# EAGLE board Dual_H-Bridge_Block-GiantPanel-v10 (EAGLE 6.6.0), part 1 of 13
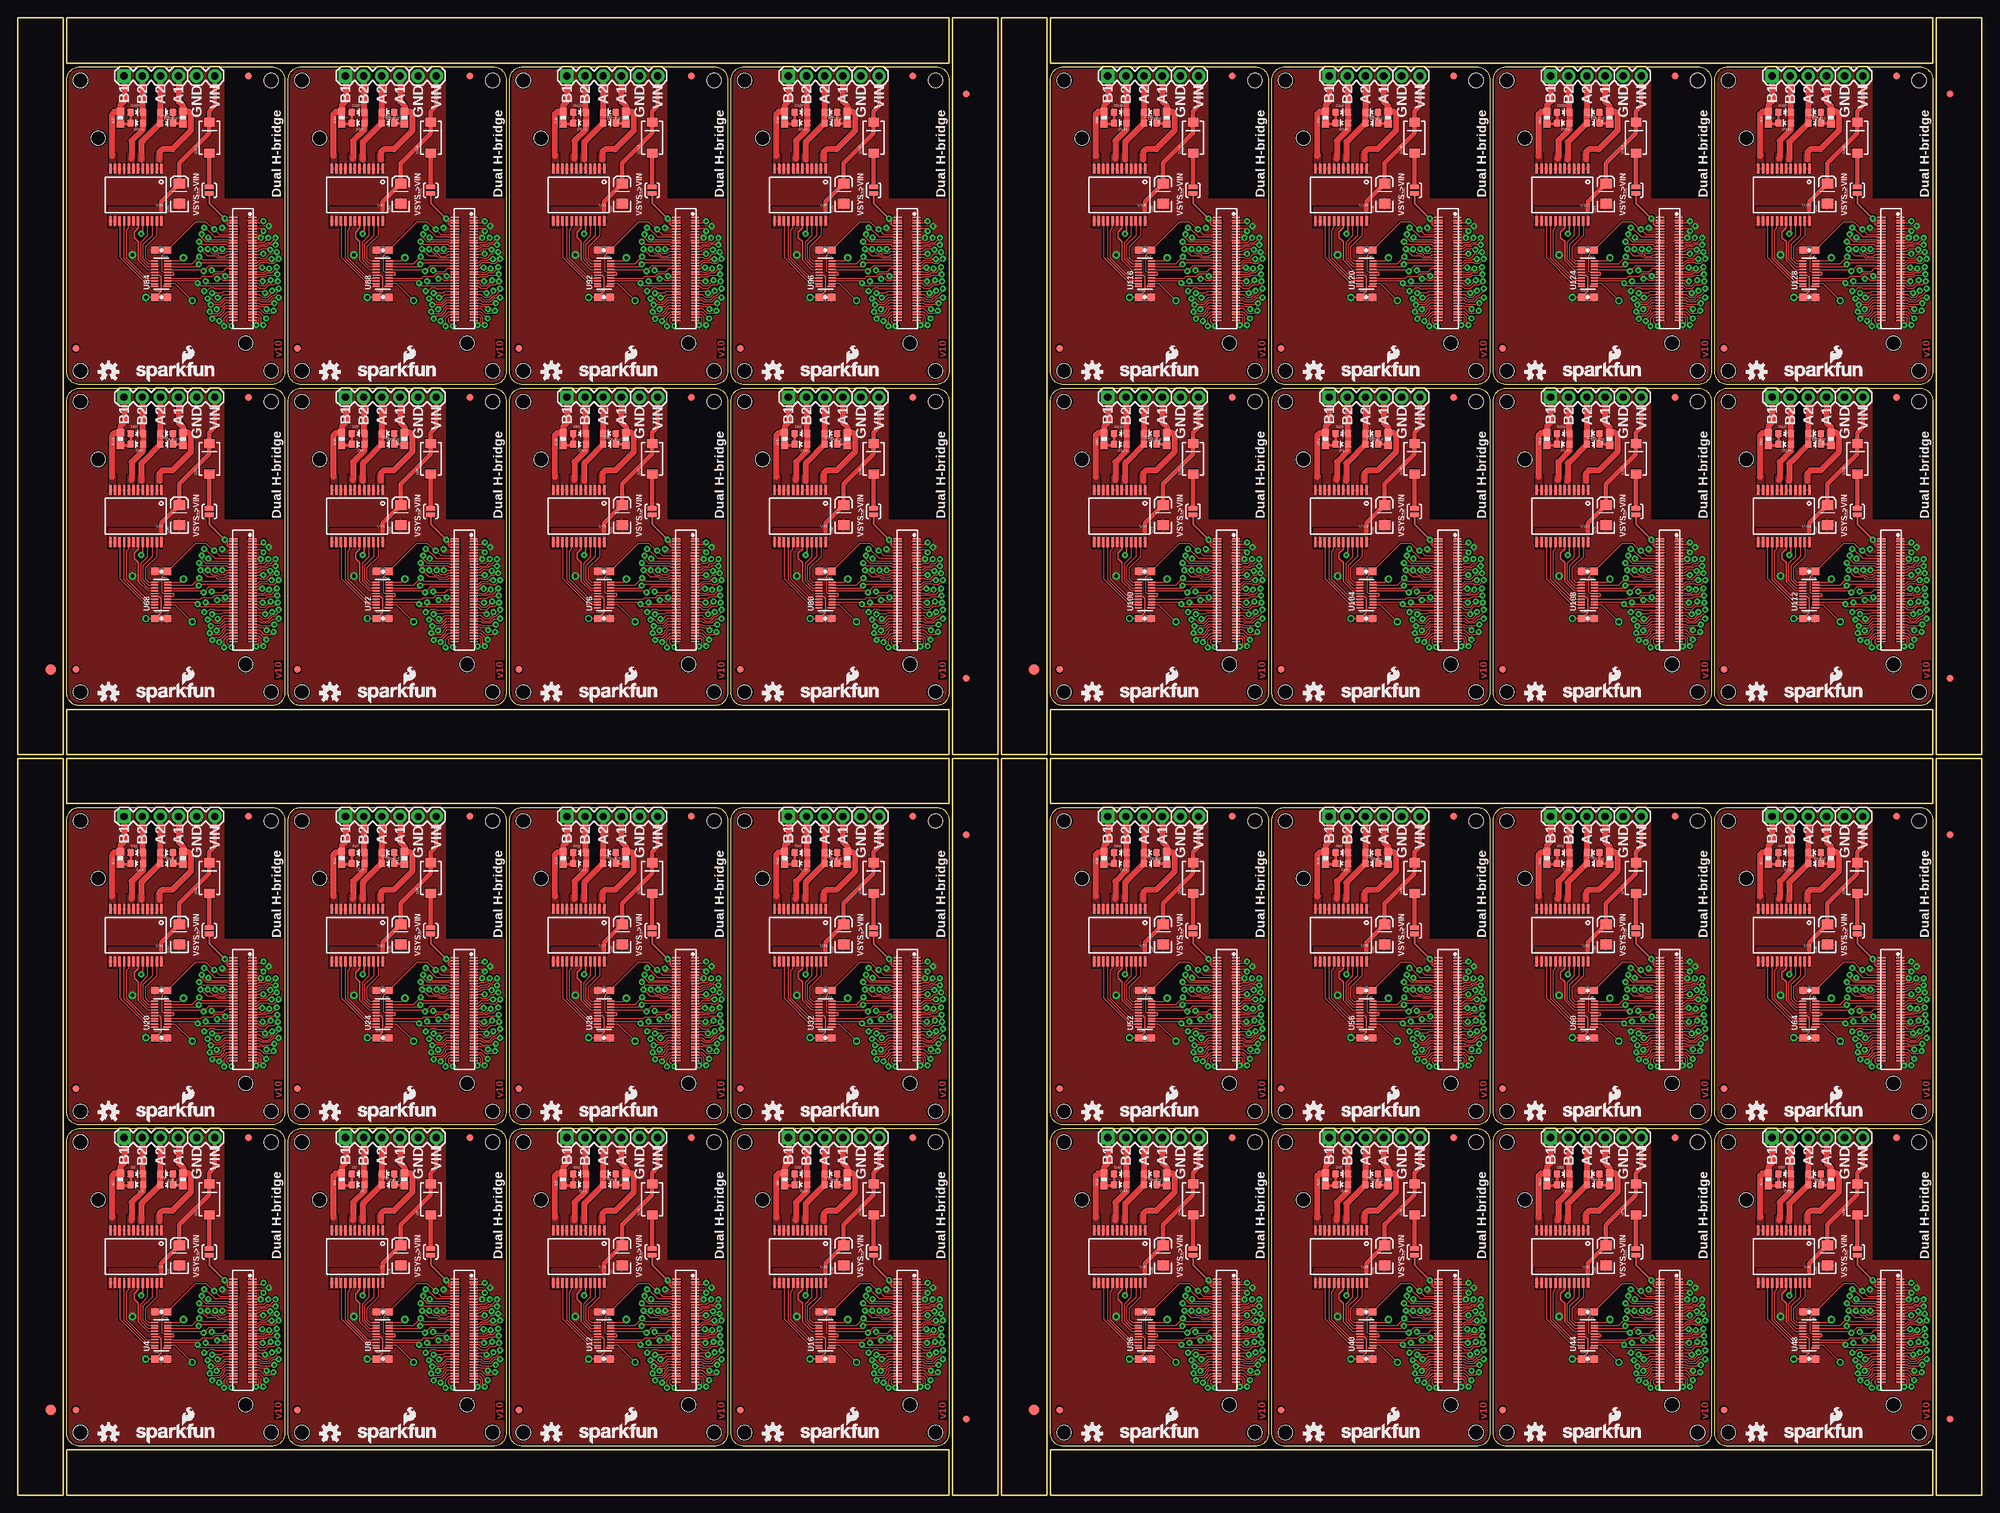
[diagram p0: board, top side]
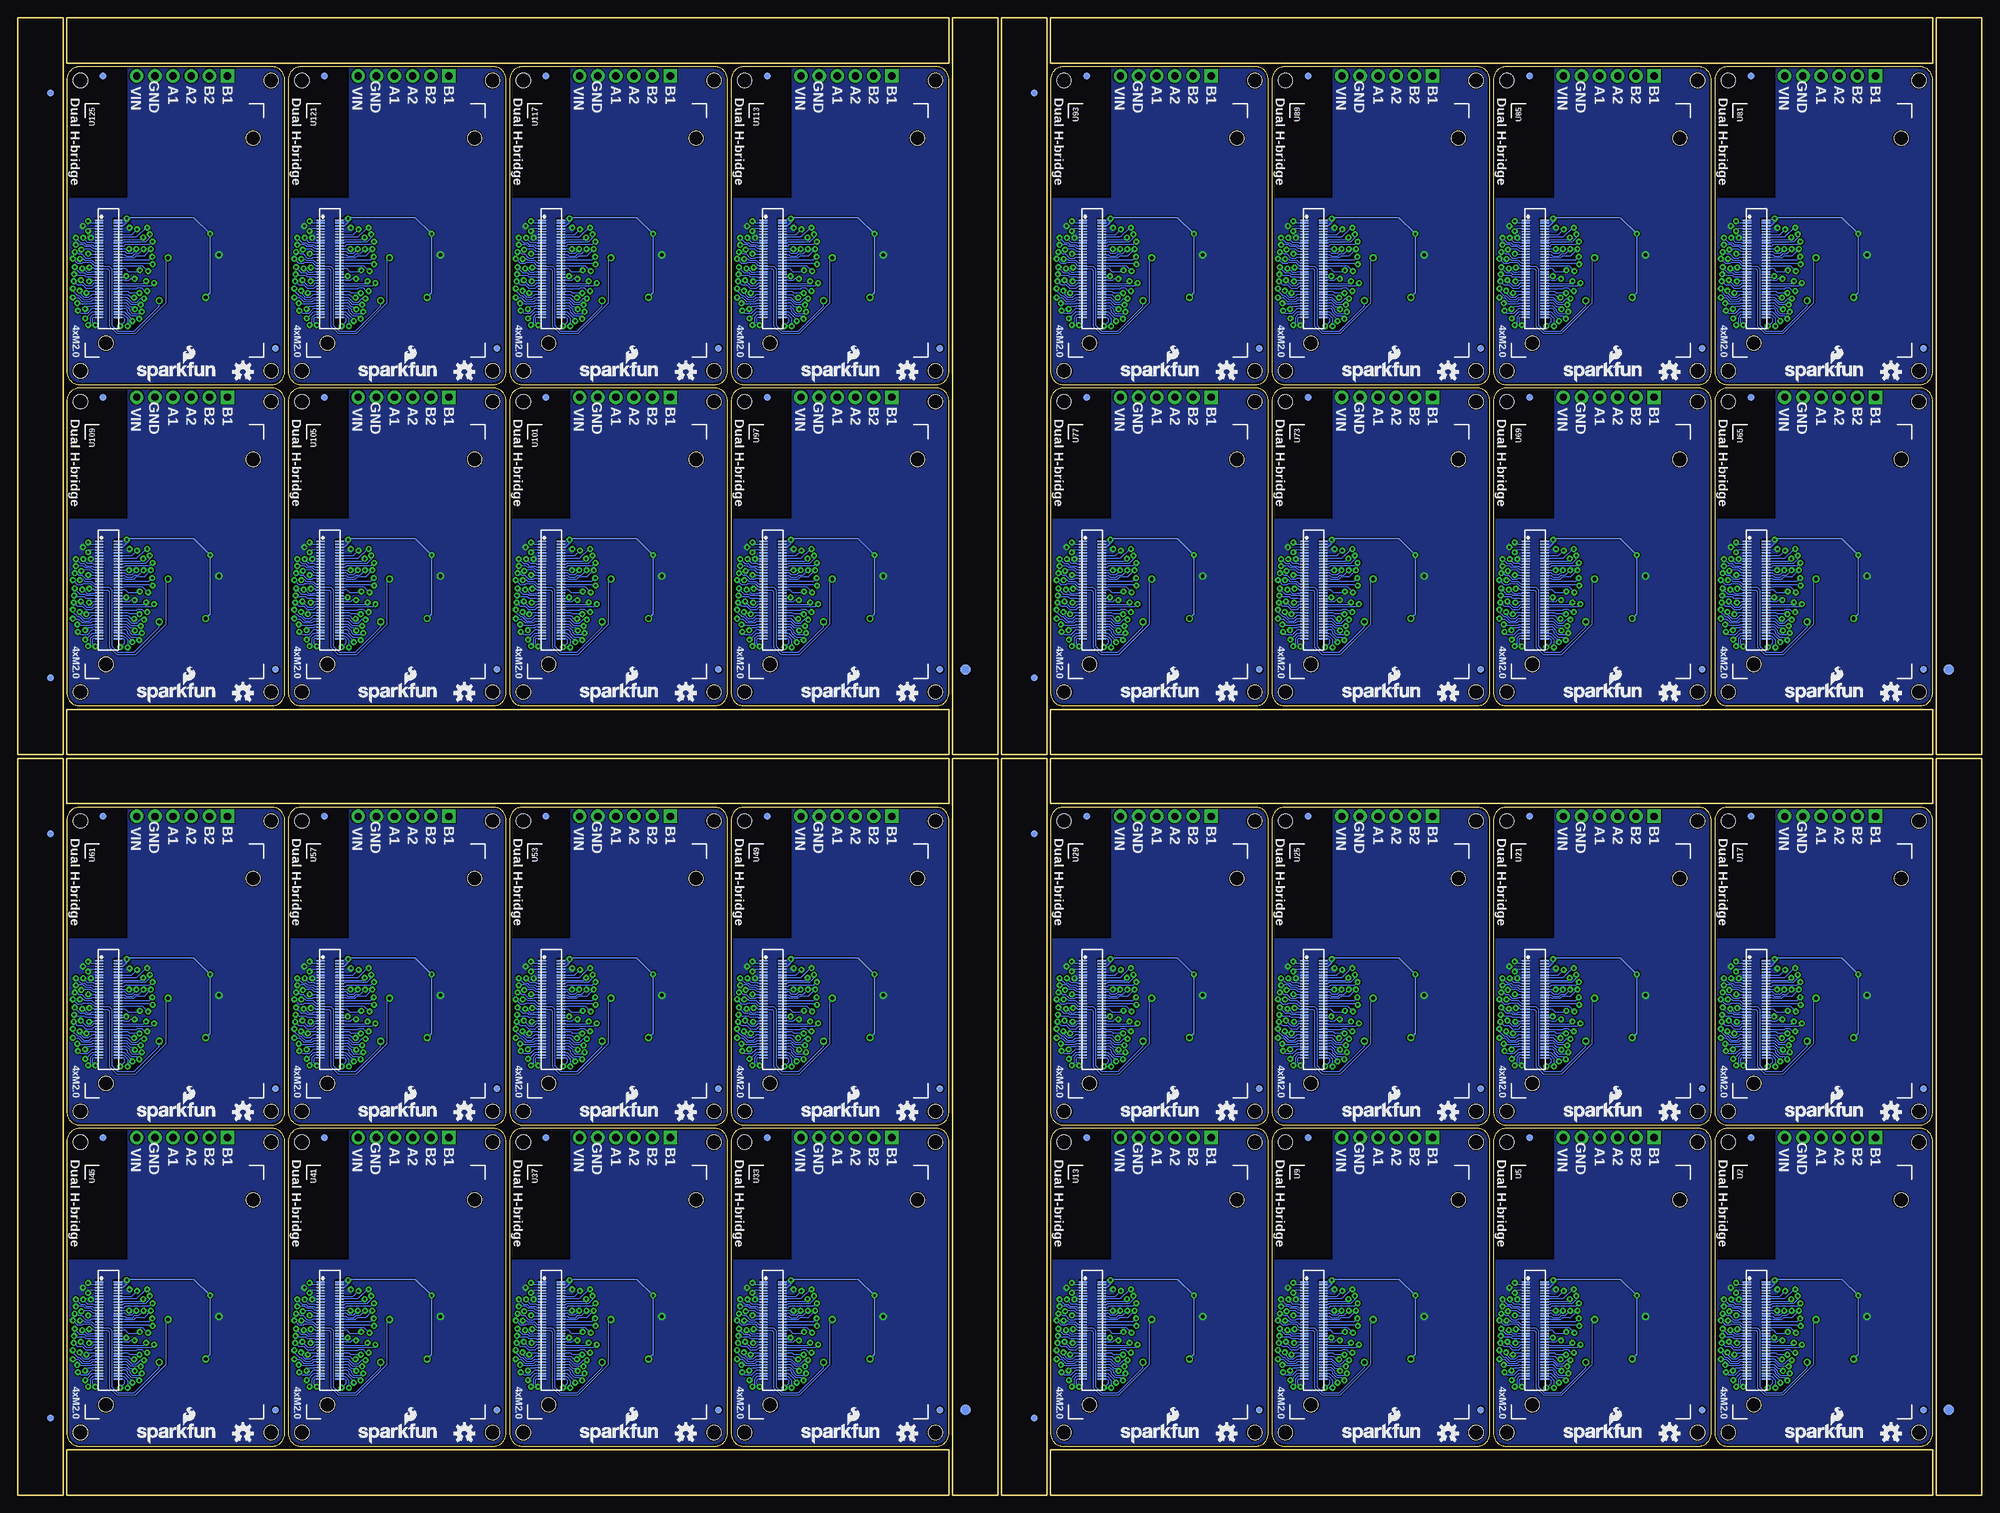
[diagram p1: board, bottom side, seen from below]

Size 274.83 x 206.76 mm. Coordinates in mm from the lower left corner, seen from the top.
Outline: 6.35,79.25 6.35,0 0,0 0,29.72
Outline: 137.16,79.25 137.16,0 130.81,0 130.81,29.72
Outline: 130.81,23.88 130.81,103.12 137.16,103.12 137.16,73.41
Outline: 0,23.88 0,103.12 6.35,103.12 6.35,73.41
Outline: 144.02,79.25 144.02,0 137.67,0 137.67,29.72
Outline: 274.83,79.25 274.83,0 268.48,0 268.48,29.72
Outline: 268.48,23.88 268.48,103.12 274.83,103.12 274.83,73.41
Outline: 137.67,23.88 137.67,103.12 144.02,103.12 144.02,73.41
Outline: 6.35,182.88 6.35,103.63 0,103.63 0,133.35
Outline: 137.16,182.88 137.16,103.63 130.81,103.63 130.81,133.35
Outline: 130.81,127.51 130.81,206.76 137.16,206.76 137.16,177.04
Outline: 0,127.51 0,206.76 6.35,206.76 6.35,177.04
Outline: 144.02,182.88 144.02,103.63 137.67,103.63 137.67,133.35
Outline: 274.83,182.88 274.83,103.63 268.48,103.63 268.48,133.35
Outline: 268.48,127.51 268.48,206.76 274.83,206.76 274.83,177.04
Outline: 137.67,127.51 137.67,206.76 144.02,206.76 144.02,177.04
Outline: 37.34,49.53 37.34,8.64 arc-90 35.56,6.86 8.64,6.86 arc-90 6.86,8.64 6.86,49.53 arc-90 8.64,51.31 35.56,51.31 arc-90 37.34,49.53
Outline: 68.33,49.53 68.33,8.64 arc-90 66.55,6.86 39.62,6.86 arc-90 37.85,8.64 37.85,49.53 arc-90 39.62,51.31 66.55,51.31 arc-90 68.33,49.53
Outline: 99.31,49.53 99.31,8.64 arc-90 97.54,6.86 70.61,6.86 arc-90 68.83,8.64 68.83,49.53 arc-90 70.61,51.31 97.54,51.31 arc-90 99.31,49.53
Outline: 130.3,49.53 130.3,8.64 arc-90 128.52,6.86 101.6,6.86 arc-90 99.82,8.64 99.82,49.53 arc-90 101.6,51.31 128.52,51.31 arc-90 130.3,49.53
Outline: 37.34,94.49 37.34,53.59 arc-90 35.56,51.82 8.64,51.82 arc-90 6.86,53.59 6.86,94.49 arc-90 8.64,96.27 35.56,96.27 arc-90 37.34,94.49
Outline: 68.33,94.49 68.33,53.59 arc-90 66.55,51.82 39.62,51.82 arc-90 37.85,53.59 37.85,94.49 arc-90 39.62,96.27 66.55,96.27 arc-90 68.33,94.49
Outline: 99.31,94.49 99.31,53.59 arc-90 97.54,51.82 70.61,51.82 arc-90 68.83,53.59 68.83,94.49 arc-90 70.61,96.27 97.54,96.27 arc-90 99.31,94.49
Outline: 130.3,94.49 130.3,53.59 arc-90 128.52,51.82 101.6,51.82 arc-90 99.82,53.59 99.82,94.49 arc-90 101.6,96.27 128.52,96.27 arc-90 130.3,94.49
Outline: 6.86,0 130.3,0 130.3,6.35 6.86,6.35 6.86,0
Outline: 130.3,103.12 6.86,103.12 6.86,96.77 130.3,96.77 130.3,103.12
Outline: 175.01,49.53 175.01,8.64 arc-90 173.23,6.86 146.3,6.86 arc-90 144.53,8.64 144.53,49.53 arc-90 146.3,51.31 173.23,51.31 arc-90 175.01,49.53
Outline: 205.99,49.53 205.99,8.64 arc-90 204.22,6.86 177.29,6.86 arc-90 175.51,8.64 175.51,49.53 arc-90 177.29,51.31 204.22,51.31 arc-90 205.99,49.53
Outline: 236.98,49.53 236.98,8.64 arc-90 235.2,6.86 208.28,6.86 arc-90 206.5,8.64 206.5,49.53 arc-90 208.28,51.31 235.2,51.31 arc-90 236.98,49.53
Outline: 267.97,49.53 267.97,8.64 arc-90 266.19,6.86 239.27,6.86 arc-90 237.49,8.64 237.49,49.53 arc-90 239.27,51.31 266.19,51.31 arc-90 267.97,49.53
Outline: 175.01,94.49 175.01,53.59 arc-90 173.23,51.82 146.3,51.82 arc-90 144.53,53.59 144.53,94.49 arc-90 146.3,96.27 173.23,96.27 arc-90 175.01,94.49
Outline: 205.99,94.49 205.99,53.59 arc-90 204.22,51.82 177.29,51.82 arc-90 175.51,53.59 175.51,94.49 arc-90 177.29,96.27 204.22,96.27 arc-90 205.99,94.49
Outline: 236.98,94.49 236.98,53.59 arc-90 235.2,51.82 208.28,51.82 arc-90 206.5,53.59 206.5,94.49 arc-90 208.28,96.27 235.2,96.27 arc-90 236.98,94.49
Outline: 267.97,94.49 267.97,53.59 arc-90 266.19,51.82 239.27,51.82 arc-90 237.49,53.59 237.49,94.49 arc-90 239.27,96.27 266.19,96.27 arc-90 267.97,94.49
Outline: 144.53,0 267.97,0 267.97,6.35 144.53,6.35 144.53,0
Outline: 267.97,103.12 144.53,103.12 144.53,96.77 267.97,96.77 267.97,103.12
Outline: 37.34,153.16 37.34,112.27 arc-90 35.56,110.49 8.64,110.49 arc-90 6.86,112.27 6.86,153.16 arc-90 8.64,154.94 35.56,154.94 arc-90 37.34,153.16
Outline: 68.33,153.16 68.33,112.27 arc-90 66.55,110.49 39.62,110.49 arc-90 37.85,112.27 37.85,153.16 arc-90 39.62,154.94 66.55,154.94 arc-90 68.33,153.16
Outline: 99.31,153.16 99.31,112.27 arc-90 97.54,110.49 70.61,110.49 arc-90 68.83,112.27 68.83,153.16 arc-90 70.61,154.94 97.54,154.94 arc-90 99.31,153.16
Outline: 130.3,153.16 130.3,112.27 arc-90 128.52,110.49 101.6,110.49 arc-90 99.82,112.27 99.82,153.16 arc-90 101.6,154.94 128.52,154.94 arc-90 130.3,153.16
Outline: 37.34,198.12 37.34,157.23 arc-90 35.56,155.45 8.64,155.45 arc-90 6.86,157.23 6.86,198.12 arc-90 8.64,199.9 35.56,199.9 arc-90 37.34,198.12
Outline: 68.33,198.12 68.33,157.23 arc-90 66.55,155.45 39.62,155.45 arc-90 37.85,157.23 37.85,198.12 arc-90 39.62,199.9 66.55,199.9 arc-90 68.33,198.12
Outline: 99.31,198.12 99.31,157.23 arc-90 97.54,155.45 70.61,155.45 arc-90 68.83,157.23 68.83,198.12 arc-90 70.61,199.9 97.54,199.9 arc-90 99.31,198.12
Outline: 130.3,198.12 130.3,157.23 arc-90 128.52,155.45 101.6,155.45 arc-90 99.82,157.23 99.82,198.12 arc-90 101.6,199.9 128.52,199.9 arc-90 130.3,198.12
Outline: 6.86,103.63 130.3,103.63 130.3,109.98 6.86,109.98 6.86,103.63
Outline: 130.3,206.76 6.86,206.76 6.86,200.41 130.3,200.41 130.3,206.76
Outline: 175.01,153.16 175.01,112.27 arc-90 173.23,110.49 146.3,110.49 arc-90 144.53,112.27 144.53,153.16 arc-90 146.3,154.94 173.23,154.94 arc-90 175.01,153.16
Outline: 205.99,153.16 205.99,112.27 arc-90 204.22,110.49 177.29,110.49 arc-90 175.51,112.27 175.51,153.16 arc-90 177.29,154.94 204.22,154.94 arc-90 205.99,153.16
Outline: 236.98,153.16 236.98,112.27 arc-90 235.2,110.49 208.28,110.49 arc-90 206.5,112.27 206.5,153.16 arc-90 208.28,154.94 235.2,154.94 arc-90 236.98,153.16
Outline: 267.97,153.16 267.97,112.27 arc-90 266.19,110.49 239.27,110.49 arc-90 237.49,112.27 237.49,153.16 arc-90 239.27,154.94 266.19,154.94 arc-90 267.97,153.16
Outline: 175.01,198.12 175.01,157.23 arc-90 173.23,155.45 146.3,155.45 arc-90 144.53,157.23 144.53,198.12 arc-90 146.3,199.9 173.23,199.9 arc-90 175.01,198.12
Outline: 205.99,198.12 205.99,157.23 arc-90 204.22,155.45 177.29,155.45 arc-90 175.51,157.23 175.51,198.12 arc-90 177.29,199.9 204.22,199.9 arc-90 205.99,198.12
Outline: 236.98,198.12 236.98,157.23 arc-90 235.2,155.45 208.28,155.45 arc-90 206.5,157.23 206.5,198.12 arc-90 208.28,199.9 235.2,199.9 arc-90 236.98,198.12
Outline: 267.97,198.12 267.97,157.23 arc-90 266.19,155.45 239.27,155.45 arc-90 237.49,157.23 237.49,198.12 arc-90 239.27,199.9 266.19,199.9 arc-90 267.97,198.12
Outline: 144.53,103.63 267.97,103.63 267.97,109.98 144.53,109.98 144.53,103.63
Outline: 267.97,206.76 144.53,206.76 144.53,200.41 267.97,200.41 267.97,206.76
Copper layers (1*16): Top 0.035mm / dielectric 1.5mm / Bottom 0.035mm
Design rules "SparkFun-2-layer *": minimum track width 6mil, minimum drill 13mil, track to track 6mil, track to pad 6mil, pad to pad 6mil, via to via 6mil, smd to smd 6mil, copper to edge 8mil, drill to drill 8mil, minimum pad ring 12mil, minimum via ring 10mil, stop-mask expansion 4mil, vias tented up to drill 20mil, thermal gap 6mil
Holes 2 mm at 35.43,8.76 8.76,8.76 8.76,49.4 35.43,49.4 66.42,8.76 39.75,8.76 39.75,49.4 66.42,49.4 97.41,8.76 70.74,8.76 70.74,49.4 97.41,49.4 128.4,8.76 101.73,8.76 101.73,49.4 128.4,49.4 35.43,53.72 8.76,53.72 8.76,94.36 35.43,94.36 66.42,53.72 39.75,53.72 39.75,94.36 66.42,94.36 97.41,53.72 70.74,53.72 70.74,94.36 97.41,94.36 128.4,53.72 101.73,53.72 101.73,94.36 128.4,94.36 173.1,8.76 146.43,8.76 146.43,49.4 173.1,49.4 204.09,8.76 177.42,8.76 177.42,49.4 204.09,49.4 235.08,8.76 208.41,8.76 208.41,49.4 235.08,49.4 266.06,8.76 239.4,8.76 239.4,49.4 266.06,49.4 173.1,53.72 146.43,53.72 146.43,94.36 173.1,94.36 204.09,53.72 177.42,53.72 177.42,94.36 204.09,94.36 235.08,53.72 208.41,53.72 208.41,94.36 235.08,94.36 266.06,53.72 239.4,53.72 239.4,94.36 266.06,94.36 35.43,112.39 8.76,112.39 8.76,153.03 35.43,153.03 66.42,112.39 39.75,112.39 39.75,153.03 66.42,153.03 97.41,112.39 70.74,112.39 70.74,153.03 97.41,153.03 128.4,112.39 101.73,112.39 101.73,153.03 128.4,153.03 35.43,157.35 8.76,157.35 8.76,197.99 35.43,197.99 66.42,157.35 39.75,157.35 39.75,197.99 66.42,197.99 97.41,157.35 70.74,157.35 70.74,197.99 97.41,197.99 128.4,157.35 101.73,157.35 101.73,197.99 128.4,197.99 173.1,112.39 146.43,112.39 146.43,153.03 173.1,153.03 204.09,112.39 177.42,112.39 177.42,153.03 204.09,153.03 235.08,112.39 208.41,112.39 208.41,153.03 235.08,153.03 266.06,112.39 239.4,112.39 239.4,153.03 266.06,153.03 173.1,157.35 146.43,157.35 146.43,197.99 173.1,197.99 204.09,157.35 177.42,157.35 177.42,197.99 204.09,197.99 235.08,157.35 208.41,157.35 208.41,197.99 235.08,197.99 266.06,157.35 239.4,157.35 239.4,197.99 266.06,197.99
tRestrict: area 29,33 to 37.3,51.3; area 59.9,33 to 68.3,51.3; area 90.9,33 to 99.3,51.3; area 121.9,33 to 130.3,51.3; area 29,78 to 37.3,96.3; area 59.9,78 to 68.3,96.3; area 90.9,78 to 99.3,96.3; area 121.9,78 to 130.3,96.3; area 166.6,33 to 175,51.3; area 197.6,33 to 206,51.3; area 228.6,33 to 237,51.3; area 259.6,33 to 268,51.3; area 166.6,78 to 175,96.3; area 197.6,78 to 206,96.3; area 228.6,78 to 237,96.3; area 259.6,78 to 268,96.3; area 29,136.7 to 37.3,154.9; area 59.9,136.7 to 68.3,154.9; area 90.9,136.7 to 99.3,154.9; area 121.9,136.7 to 130.3,154.9; area 29,181.6 to 37.3,199.9; area 59.9,181.6 to 68.3,199.9; area 90.9,181.6 to 99.3,199.9; area 121.9,181.6 to 130.3,199.9; area 166.6,136.7 to 175,154.9; area 197.6,136.7 to 206,154.9; area 228.6,136.7 to 237,154.9; area 259.6,136.7 to 268,154.9; area 166.6,181.6 to 175,199.9; area 197.6,181.6 to 206,199.9; area 228.6,181.6 to 237,199.9; area 259.6,181.6 to 268,199.9
bRestrict: area 29,33 to 37.3,51.3; area 59.9,33 to 68.3,51.3; area 90.9,33 to 99.3,51.3; area 121.9,33 to 130.3,51.3; area 29,78 to 37.3,96.3; area 59.9,78 to 68.3,96.3; area 90.9,78 to 99.3,96.3; area 121.9,78 to 130.3,96.3; area 166.6,33 to 175,51.3; area 197.6,33 to 206,51.3; area 228.6,33 to 237,51.3; area 259.6,33 to 268,51.3; area 166.6,78 to 175,96.3; area 197.6,78 to 206,96.3; area 228.6,78 to 237,96.3; area 259.6,78 to 268,96.3; area 29,136.7 to 37.3,154.9; area 59.9,136.7 to 68.3,154.9; area 90.9,136.7 to 99.3,154.9; area 121.9,136.7 to 130.3,154.9; area 29,181.6 to 37.3,199.9; area 59.9,181.6 to 68.3,199.9; area 90.9,181.6 to 99.3,199.9; area 121.9,181.6 to 130.3,199.9; area 166.6,136.7 to 175,154.9; area 197.6,136.7 to 206,154.9; area 228.6,136.7 to 237,154.9; area 259.6,136.7 to 268,154.9; area 166.6,181.6 to 175,199.9; area 197.6,181.6 to 206,199.9; area 228.6,181.6 to 237,199.9; area 259.6,181.6 to 268,199.9; 64 lines

## Footprints (pad centres in the part's own frame; a part is rotated, then mirrored left to right if it is on the bottom)
EIA3216 = smd 1.4 x 1.6: A 1.4,0; C -1.4,0
0603-CAP = smd 1.1 x 1: 1 -0.85,0; 2 0.85,0
SMA-DIODE = smd 1.27 x 1.47: A -2.15,0; C 2.15,0
LED-0603 = smd 1 x 1: A 0,-0.877; C 0,0.877
FIDUCIAL-1.5X3 = smd 1.5 x 1.5: 1 0,0
FIDUCIAL-1X2 = smd 1 x 1: 1 0,0
1X04 = drill 1.016 pad 1.88 square: 1 0,0 | drill 1.016 pad 1.88: 2 2.54,0; 3 5.08,0; 4 7.62,0
1X02 = drill 1.016 pad 1.88: 1 0,0; 2 2.54,0
0603-RES = smd 1.1 x 1: 1 -0.85,0; 2 0.85,0
PAD-JUMPER-2-NO_YES_SILK = smd 0.635 x 1.27: 1 -0.45,0; 2 0.45,0
SSOP24 = smd 0.348 x 1.397: 1 -3.575,-3.656; 2 -2.925,-3.656; 3 -2.275,-3.656; 4 -1.625,-3.656; 5 -0.975,-3.656; 6 -0.325,-3.656; 7 0.325,-3.656; 8 0.975,-3.656; 9 1.625,-3.656; 10 2.275,-3.656; 11 2.925,-3.656; 12 3.575,-3.656; 13 3.575,3.656; 14 2.925,3.656; 15 2.275,3.656; 16 1.625,3.656; 17 0.975,3.656; 18 0.325,3.656; 19 -0.325,3.656; 20 -0.975,3.656; 21 -1.625,3.656; 22 -2.275,3.656; 23 -2.925,3.656; 24 -3.575,3.656
EDISON_DAUGHTER = smd 1.14 x 0.2: 1 1.98,19.17; 2 4.62,19.17; 3 1.98,18.77; 4 4.62,18.77; 5 1.98,18.37; 6 4.62,18.37; 7 1.98,17.97; 8 4.62,17.97; 9 1.98,17.57; 10 4.62,17.57; 11 1.98,17.17; 12 4.62,17.17; 13 1.98,16.77; 14 4.62,16.77; 15 1.98,16.37; 16 4.62,16.37; 17 1.98,15.97; 18 4.62,15.97; 19 1.98,15.57; 20 4.62,15.57; 21 1.98,15.17; 22 4.62,15.17; 23 1.98,14.77; 24 4.62,14.77; 25 1.98,14.37; 26 4.62,14.37; 27 1.98,13.97; 28 4.62,13.97; 29 1.98,13.57; 30 4.62,13.57; 31 1.98,13.17; 32 4.62,13.17; 33 1.98,12.77; 34 4.62,12.77; 35 1.98,12.37; 36 4.62,12.37; 37 1.98,11.97; 38 4.62,11.97; 39 1.98,11.57; 40 4.62,11.57; 41 1.98,11.17; 42 4.62,11.17; 43 1.98,10.77; 44 4.62,10.77; 45 1.98,10.37; 46 4.62,10.37; 47 1.98,9.97; 48 4.62,9.97; 49 1.98,9.57; 50 4.62,9.57; 51 1.98,9.17; 52 4.62,9.17; 53 1.98,8.77; 54 4.62,8.77; 55 1.98,8.37; 56 4.62,8.37; 57 1.98,7.97; 58 4.62,7.97; 59 1.98,7.57; 60 4.62,7.57; 61 1.98,7.17; 62 4.62,7.17; 63 1.98,6.77; 64 4.62,6.77; 65 1.98,6.37; 66 4.62,6.37; 67 1.98,5.97; 68 4.62,5.97; 69 1.98,5.57; 70 4.62,5.57 | hole 2: 23.53,30.67; 2.93,1.98
DF40C-70DP-0.4(51) = smd 0.2 x 1.14 bottom: 1 6.8,1.32; 2 6.8,-1.32; 3 6.4,1.32; 4 6.4,-1.32; 5 6,1.32; 6 6,-1.32; 7 5.6,1.32; 8 5.6,-1.32; 9 5.2,1.32; 10 5.2,-1.32; 11 4.8,1.32; 12 4.8,-1.32; 13 4.4,1.32; 14 4.4,-1.32; 15 4,1.32; 16 4,-1.32; 17 3.6,1.32; 18 3.6,-1.32; 19 3.2,1.32; 20 3.2,-1.32; 21 2.8,1.32; 22 2.8,-1.32; 23 2.4,1.32; 24 2.4,-1.32; 25 2,1.32; 26 2,-1.32; 27 1.6,1.32; 28 1.6,-1.32; 29 1.2,1.32; 30 1.2,-1.32; 31 0.8,1.32; 32 0.8,-1.32; 33 0.4,1.32; 34 0.4,-1.32; 35 0,1.32; 36 0,-1.32; 37 -0.4,1.32; 38 -0.4,-1.32; 39 -0.8,1.32; 40 -0.8,-1.32; 41 -1.2,1.32; 42 -1.2,-1.32; 43 -1.6,1.32; 44 -1.6,-1.32; 45 -2,1.32; 46 -2,-1.32; 47 -2.4,1.32; 48 -2.4,-1.32; 49 -2.8,1.32; 50 -2.8,-1.32; 51 -3.2,1.32; 52 -3.2,-1.32; 53 -3.6,1.32; 54 -3.6,-1.32; 55 -4,1.32; 56 -4,-1.32; 57 -4.4,1.32; 58 -4.4,-1.32; 59 -4.8,1.32; 60 -4.8,-1.32; 61 -5.2,1.32; 62 -5.2,-1.32; 63 -5.6,1.32; 64 -5.6,-1.32; 65 -6,1.32; 66 -6,-1.32; 67 -6.4,1.32; 68 -6.4,-1.32; 69 -6.8,1.32; 70 -6.8,-1.32; NC1 7.2,1.32; NC2 7.2,-1.32; NC3 -7.2,-1.32; NC4 -7.2,1.32
UFDFN-20 = smd 0.2 x 1.1: 1 -1.8,-0.85 | smd 0.2 x 1: 2 -1.4,-0.9; 3 -1,-0.9; 4 -0.6,-0.9; 5 -0.2,-0.9; 6 0.2,-0.9; 7 0.6,-0.9; 8 1,-0.9; 9 1.4,-0.9; 10 1.8,-0.9; 11 1.8,0.9; 12 1.4,0.9; 13 1,0.9; 14 0.6,0.9; 15 0.2,0.9; 16 -0.2,0.9; 17 -0.6,0.9; 18 -1,0.9; 19 -1.4,0.9; 20 -1.8,0.9